# Altium PCB BatteryManagementSystem_oldcpu.PcbDoc (part 2 of 2)
Units mil, origin at the board's own origin, x right, y up, seen from the top; angles counter-clockwise.
Board outline 5250 x 2500 mil, 4 copper layers (Top Layer, Internal Plane 2, Internal Plane 1, Bottom Layer); 223 components, 168 nets, 746 pads, 194 vias.
Unrouted connection lines stored in the file: 11.
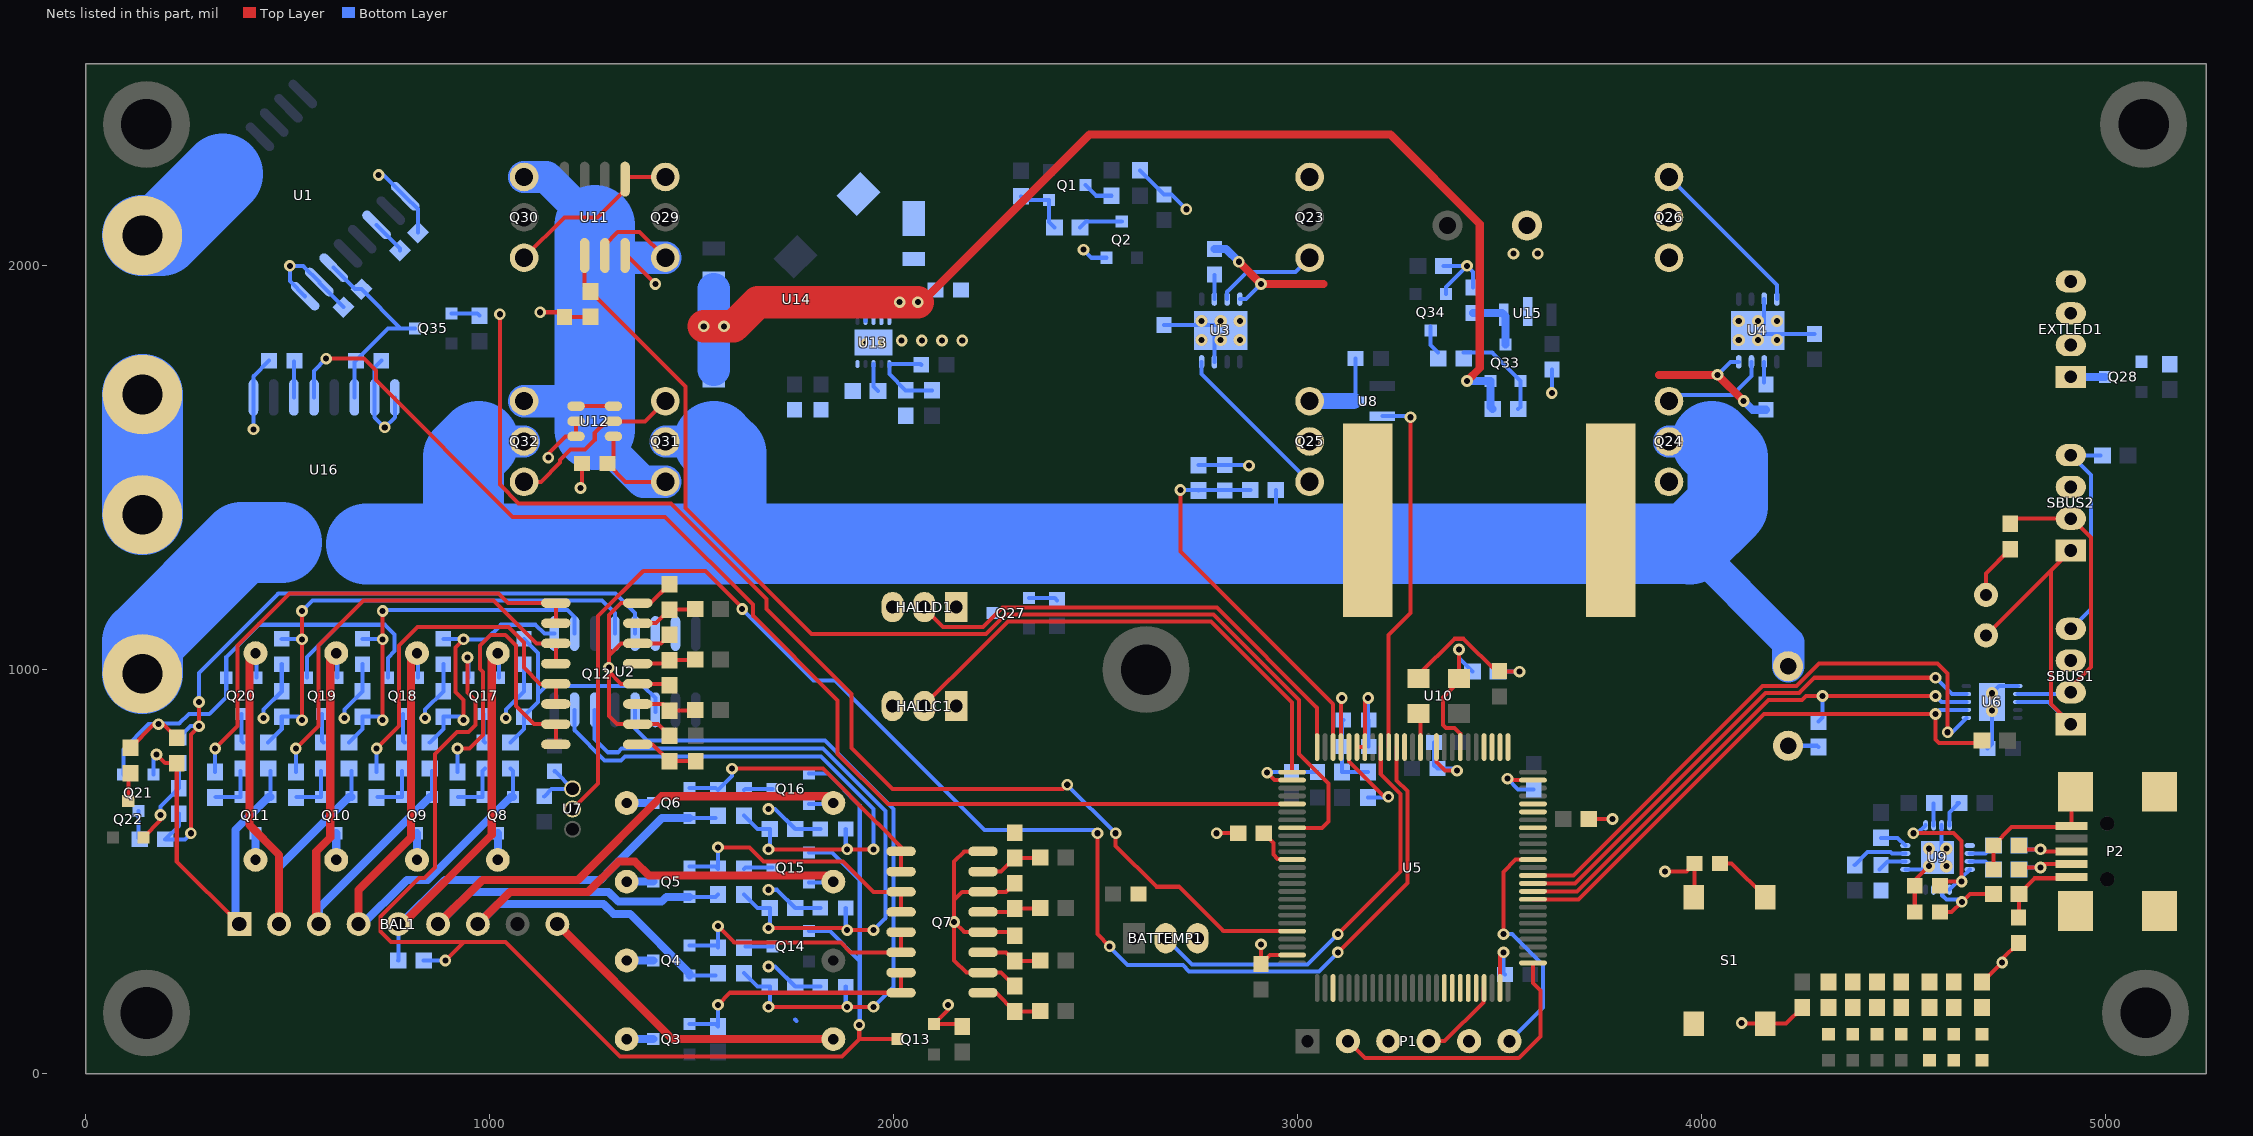
[diagram p4: the nets of this part, all layers, seen from the top]

## Via types
v1: diameter 29, hole 15, Top Layer to Bottom Layer, 174 vias
v2: diameter 30, hole 15, Top Layer to Bottom Layer, tented top, 12 vias
v3: diameter 30, hole 15, Top Layer to Bottom Layer, 6 vias
v4: diameter 19.68, hole 7.87, Top Layer to Bottom Layer, 2 vias

## Nets (pads, with @x,y where several pads share a name; then routed paths per layer and width w, separated by ;. In a path a pad name is that pad's centre, name@x,y a point inside that pad or via, vN(x,y) a via of type N, cw(c..) or ccw(c..) an arc to the next point about the centre after c; other vN are vias at no path point) (continued)
C2: BAL1.7 Q4.S Q15.S R7.1 R16.2 | length 1708.9
  Top Layer w20: BAL1.7@970.55,370 1050.12,449.57 1243.62,449.57 1318.58,524.53 1359.61,524.53 1394.14,490 1835.91,490 R16.2@1850.91,475
  Bottom Layer w10: Q4.S@1495.08,242.6 R7.1@1559.09,242.6 ; Q15.S@1790.08,472.6 R16.2@1848.5,472.6
  Bottom Layer w20: BAL1.7@970.55,370 1020.12,419.57 1282.06,419.57 1306.15,395.47 1347.65,395.47 1495.08,248.05 Q4.S@1495.08,242.6
C3: BAL1.6 Q5.S Q16.S R8.1 R17.2 | length 1918.4
  Top Layer w20: BAL1.6@872.13,370 981.69,479.57 1218.7,479.57 1425.64,686.5 1834.41,686.5 R17.2@1850.91,670
  Bottom Layer w10: Q5.S@1495.08,437.6 1559.09,437.6 R8.1@1565,443.5 ; Q16.S@1790.08,667.6 R17.2@1848.5,667.6
  Bottom Layer w20: BAL1.6@872.13,370 951.69,449.57 1294.48,449.57 1318.58,425.47 1425.57,425.47 1437.69,437.6 Q5.S@1495.08,437.6
C4: BAL1.5 Q6.S Q17.S R9.1 R34.2 R42.1 | length 1829.6
  Top Layer w20: BAL1.5@773.7,360 1005,591.3 1005,1025.91 R34.2@1020,1040.91
  Bottom Layer w10: R42.1@773.5,280 773.7,280.2 BAL1.5@773.7,370 ; R34.2@1020,1040.91 1022.4,1038.5 Q17.S@1022.4,980.08 ; Q6.S@1495.08,632.6 R9.1@1559.09,632.6
  Bottom Layer w20: BAL1.5@773.7,370 779.3,370 888.87,479.57 1274.57,479.57 1289.57,494.57 1289.57,495.51 1426.65,632.6 Q6.S@1495.08,632.6
C5: BAL1.4 Q8.S Q18.S R22.1 R35.2 | length 1391.8
  Top Layer w20: BAL1.4@675.28,360 675.28,454.41 805,584.14 805,1025.91 R35.2@820,1040.91
  Bottom Layer w10: R35.2@820,1040.91 822.4,1038.5 Q18.S@822.4,980.08 ; R22.1@1051.5,755 1057.4,749.09 Q8.S@1057.4,685.08
  Bottom Layer w20: BAL1.4@675.28,360 794.84,479.57 846.44,479.57 1051.95,685.08 Q8.S@1057.4,685.08
C6: BAL1.3 Q9.S Q19.S R23.1 R36.2 | length 1274.4
  Top Layer w20: BAL1.3@576.85,360 570.47,366.38 570.47,549.61 605,584.14 605,1025.91 R36.2@620,1040.91
  Bottom Layer w10: R36.2@620,1040.91 622.4,1038.5 Q19.S@622.4,980.08 ; Q9.S@857.4,685.08 R23.1@857.4,749.09
  Bottom Layer w20: BAL1.3@576.85,360 576.85,409.98 851.95,685.08 Q9.S@857.4,685.08
C7: BAL1.2 Q10.S Q20.S R24.1 R37.2 | length 1245.8
  Top Layer w20: R37.2@420,1040.91 405,1025.91 405,615 478.43,541.57 BAL1.2@478.43,360
  Bottom Layer w10: R37.2@420,1040.91 422.4,1038.5 Q20.S@422.4,980.08 ; Q10.S@657.4,685.08 R24.1@657.4,749.09
  Bottom Layer w20: BAL1.2@478.43,360 478.43,511.55 651.95,685.08 Q10.S@657.4,685.08
C8: BAL1.1 Q11.S Q21.S R25.1 R51.1 | length 1000.5
  Top Layer w10: v1(175,790) 196.5,768.5 R51.1@225,768.5 225,525 BAL1.1@380,370
  Bottom Layer w10: Q21.S@167.4,740.08 167.4,782.4 v1(175,790) ; Q11.S@457.4,685.08 R25.1@457.4,749.09
  Bottom Layer w20: BAL1.1@370.47,369.53 370.47,603.6 451.95,685.08 Q11.S@457.4,685.08 ; BAL1.1@375,365 BAL1.1@380,360
CGND: BAL1.9 R14.2 | length 801.6
  Top Layer w20: BAL1.9@1167.4,370 1452.4,85 R14.2@1850.91,85
CLK8MHZ: U5.12 U10.3 | length 85.4
  Top Layer w10: U10.3@3300,891.69 3304.68,887.01 U5.12@3304.68,808.23
CLK_EN: R78.2 U5.7 U10.1 | length 357.6
  Top Layer w10: v1(3400,1050) U10.1@3400,978.31 3400,970.29 3360.44,930.73 3360.44,863.1 3367.47,856.07 3389.45,856.07 3403.11,842.41 U5.7@3403.11,808.23
  Bottom Layer w10: v1(3400,1050) 3400,1028.5 R78.2@3433.5,995
DEBUG_CTS: R72.2 U5.70 U9.4 | length 69.9
  Bottom Layer w10: U9.4@4614.53,614.72 4614.53,646.02 R72.2@4638.5,670 R72.2@4633.82,670
DEBUG_RTS: R71.2 U5.71 U9.16 | length 68.1
  Bottom Layer w10: R71.2@4445,583.5 4486.3,583.5 U9.16@4505.28,564.53
DEBUG_RXI: R69.2 U5.69 U9.15 | length 139.8
  Bottom Layer w10: R69.2@4380,516.5 4411.69,548.18 4468.67,548.18 4472.01,544.84 U9.15@4505.28,544.84
DEBUG_TXO: R70.2 U5.68 U9.2 | length 53.9
  Bottom Layer w10: U9.2@4575.16,614.72 R70.2@4575.16,668.66
DISCHARGE_EN: R85.1 U5.33 U11.2 | length 2911.8
  Top Layer w10: U11.2@1235,2025.51 1235,1951.5 R85.1@1250,1936.5 1485,1701.5 1485,1400 1796.5,1088.5 2228.5,1088.5 2276.5,1136.5 2792.54,1136.5 3003.77,925.27 3003.77,791.21 3076.5,718.48 3076.5,624.02 3060.98,608.5 2986.85,608.5 U5.33@2986.77,608.43
EXTLED_5V_E\N\: Q28.G R62.2 U5.96
EXTLED_CLK: EXTLED1.3 U5.95
EXTLED_DATA: EXTLED1.2 U5.93
GND: BAT1.- BATTEMP1.3 C1.2 C2.2 C3.2 C4.2 C5.2 C6.2 C7.2 C8.2 C9.2 C10.2 C11.2 C12.2 C13.2 C14.2 C15.2 C16.2 C19.1 C20.1 C21.1 C22.1 C23.2 C24.2 C25.2 C26.2 C28.2 C29.2 C30.2 C31.2 C32.2 C33.2 C34.2 C35.2 C36.2 C37.2 C38.2 C39.2 C40.2 C41.1 C43.2 C44.2 C46.2 C47.2 C48.2 C49.2 C50.2 C51.2 D2.A EXTLED1.4 HALLC1.3 HALLD1.3 P1.3 P2.5 P2.SHD Q2.S Q7.10 Q7.12 Q7.14 Q7.16 Q12.10 Q12.12 Q12.14 Q12.16 Q13.S Q22.S Q25.S Q26.S Q34.S R4.2 R5.2 R18.2 R19.2 R20.2 R21.2 R38.2 R39.2 R40.2 R41.2 R47.2 R48.2 R49.2 R50.2 R57.2 R58.2 R59.2 R60.2 R65.2 R66.2 R67.2 R77.2 R78.1 R85.2 R86.2 R88.2 R91.2 R93.2 RAIL1.- S1.A SBUS1.3 SBUS2.3 U1.9 U1.15 U1.16 U2.6 U2.7 U3.7 U4.7 U5.10 U5.19 U5.20 U5.27 U5.49 U5.74 U5.99 U6.6 U7.3 U8.3 U9.3 U9.13 U10.2 U11.4 U12.2 U12.3 U13.10 U13.PAD U14.1 U15.2 U16.9 U16.15 U16.16 | length 9033.5
  Top Layer w10: Q22.S@142.4,584.92 185,627.52 v1(185,640) ; v1(1125,1885) C40.2@1181.5,1885 ; v1(1145,1525) 1145,1535 1187.6,1577.6 U12.3@1213.74,1577.6 U12.2@1213.74,1615 ; C40.2@1185,1873.5 R85.2@1250,1873.5 ; v1(1225,1450) 1228.5,1453.5 C41.1@1228.5,1510 ; U11.4@1335,2000 U11.4@1335,2025.51 1339.49,2025.51 v1(1410,1955) ; R38.2@1445,836.5 1416.5,865 Q12.10@1366.38,865 1315,865 1295,885 v1@1295,995 ; R39.2@1445,961.5 1441.5,965 Q12.12@1366.38,965 1325,965 v1@1295,995 ; R40.2@1445,1086.5 1423.5,1065 Q12.14@1366.38,1065 1325,1065 1295,1035 ; R41.2@1445,1211.5 1398.5,1165 Q12.16@1366.38,1165 1325,1165 1295,1135 1295,1035 ; v1(2135,170) 2135,157.32 Q13.S@2100.08,122.4 2164.09,122.4 R5.2@2170,116.5 ; Q7.16@2221.38,550 2175,550 2150,525 2150,430 ; R18.2@2300,216.5 2266.5,250 Q7.10@2221.38,250 2180,250 2150,280 v1(2150,375) ; R19.2@2300,341.5 2291.5,350 Q7.12@2221.38,350 2175,350 v1(2150,375) ; R20.2@2300,471.5 2278.5,450 Q7.14@2221.38,450 2170,450 2150,430 ; BATTEMP1.3@2752.48,335 BATTEMP1.3@2752.48,359.02 ; v1(2800,595) R67.2@2853.5,595 ; v1(2910,320) C31.2@2910,271.5 2931.97,293.46 U5.49@2986.77,293.46 ; v1(2925,745) 2943.46,726.54 U5.27@2986.77,726.54 ; U5.20@3147.2,808.23 U5.19@3166.89,808.23 3166.89,921.89 v1(3175,930) ; U10.2@3300,978.31 3300,987.48 3389.02,1076.5 3410.98,1076.5 3492.48,995 v1(3550,995) ; U5.10@3344.06,808.23 3344.06,770.94 3365,750 v1(3395,750) ; U5.74@3501.54,211.77 v1@3501.54,291.54 ; v1(3520,730) 3523.46,726.54 U5.99@3583.23,726.54 ; R77.2@3721.5,630 v1(3780,630) ; v1@3900,500 3963.5,500 C38.2@3983.5,520 3983.5,438.58 S1.A@3981.42,436.5 ; C26.2@4528.5,400 C28.2@4528.5,465 4528.5,478.5 v3(4563.35,513.35) ; R66.2@4695,226.5 4696.5,226.5 v1(4745,275) 4745,283.5 C23.2@4785,323.5 ; C24.2@4723.5,505 C25.2@4723.5,565 4768.5,610 4913.43,610 P2.5@4916.42,612.99 4916.42,687.8 P2.SHD@4926.26,697.64 ; v1@1295,995 v1(1295,1005) 1295,1035 ; v1(2150,375) 2150,430
  Bottom Layer w10: v1(185,640) 185,661.5 R60.2@230,706.5 C12.2@230,768.5 C12.2@230.22,768.5 ; v1(415,1595) U16.9@415,1674.13 415,1726.5 C50.2@453.5,1765 ; v1(440,880) 440,901.5 R59.2@485,946.5 C11.2@485,1013.5 ; U1.16@542.92,1924.59 505,1962.51 v1(505,2000) 538.22,2000 U1.15@578.28,1959.94 578.28,1957.18 C1.2@637.73,1897.73 ; v1(640,880) 640,901.5 R58.2@685,946.5 C10.2@685,1013.5 ; v1(725,2225) 737.49,2225 U1.9@790.41,2172.08 822.27,2140.22 C3.2@822.27,2082.27 ; C49.2@731.5,1765 715,1748.5 U16.15@715,1674.13 715,1625 v1(740,1600) 765,1625 U16.16@765,1674.13 ; v1@830,880 v1(840,880) 840,901.5 R57.2@885,946.5 C9.2@885,1013.5 ; v1(1040,880) 1040,901.5 R50.2@1085,946.5 C8.2@1085,1010 ; C21.1@1135,686.5 1153.5,705 U7.3@1205,705 1161.5,748.5 C2.2@1160,748.5 ; v1(1690,265) 1706.5,265 R47.2@1756.5,215 C5.2@1818.5,215 ; v1(1690,455) 1711.5,455 R48.2@1756.5,410 C6.2@1818.5,410 ; v1(1690,655) 1706.5,655 R49.2@1756.5,605 C7.2@1818.5,605 ; 1756.5,133.5 1760,130 ; v1(2470,2040) 2490.08,2019.92 Q2.S@2527.6,2019.92 ; R4.2@2610,2236.5 C4.2@2670,2176.5 2688.5,2176.5 v1(2725,2140) ; C16.2@2670,1853.5 U3.7@2796.5,1853.5 ; BATTEMP1.3@2752.48,335 BATTEMP1.3@2752.48,360 ; R93.2@2755,1506.5 C51.2@2820,1506.5 2878.5,1506.5 v1(2880,1505) ; U3.7@2794.25,1762.24 U3.7@2794.25,1824.25 ; v1(2925,745) 2926.5,746.5 C30.2@2985,746.5 C34.2@3050,746.5 ; U8.3@3139.57,1665 3143.5,1668.94 C22.1@3143.5,1770 ; C36.2@3175,876.5 v1(3175,930) ; C37.2@3176.5,810 C36.2@3176.5,875 ; C39.2@3338.5,820 3338.5,762.99 C29.2@3346.5,755 3390,755 v1(3395,750) ; R91.2@3361.5,2000 v1(3420,2000) ; Q34.S@3367.4,1930.08 3367.4,1947.4 v1(3420,2000) ; C47.2@3435,1946.5 3435,1985 v1(3420,2000) ; R78.1@3496.5,995 v1(3550,995) ; v1(3510,300) 3510,248.5 C32.2@3513.5,245 ; v1(3520,730) 3546.5,703.5 C33.2@3585,703.5 ; v1(3630,1685) C48.2@3630,1743.5 ; U4.7@4148.5,1831.5 C15.2@4280,1831.5 ; U4.7@4155.75,1855.75 U4.7@4155.75,1917.76 ; C13.2@4215,811.57 4286.93,811.57 R65.2@4290,808.5 ; U9.13@4505.28,505.47 4555.47,505.47 v3(4563.35,513.35) ; U9.13@4585,535 4594.84,544.84 U9.3@4594.84,614.72 ; C19.1@4708.5,805 4720,816.5 v3(4720,898.35) ; v3(4720,941.65) 4737.72,959.37 U6.6@4783.58,959.37 ; SBUS1.3@4915,1022.48 SBUS1.3@4915,1035.36
  Bottom Layer w40: Q25.S@3030,1665 U8.3@3139.57,1665
  Bottom Layer w200: RAIL1.-@140,1383.7 BAT1.-@140,1681.3
  other v1: 3910,500 2020,1815 2070,1815 2120,1815 2170,1815 3535,2030 3595,2030
  other v2: 2762.76,1816.38 2810,1816.38 2857.24,1816.38 4092.76,1816.38 4140,1816.38 4187.24,1816.38 2762.76,1863.62 2810,1863.62 2857.24,1863.62 4092.76,1863.62 4140,1863.62 4187.24,1863.62
  other v3: 4606.65,513.35 4563.35,556.65 4606.65,556.65
  other v4: 1928.35,1810 1971.65,1810
HALL_3V3_E\N\: Q27.G R61.2 U5.67 | length 72.4
  Bottom Layer w10: Q27.G@2335.08,1177.4 2399.09,1177.4 R61.2@2405,1171.5
HALL_CHARGE: HALLC1.2 U5.26 | length 1254.6
  Top Layer w10: HALLC1.2@2076.26,910 2076.26,913.23 2206.03,1043 2207.04,1043 2283.54,1119.5 2785.5,1119.5 2986.77,918.23 U5.26@2986.77,746.22
HALL_DISCHARGE: HALLD1.2 U5.25 | length 1218.1
  Top Layer w10: HALLD1.2@2076.26,1158.23 HALLD1.2@2076.26,1155 2076.26,1151.77 2122.53,1105.5 2221.46,1105.5 2269.46,1153.5 2800.94,1153.5 3048.78,905.66 U5.25@3048.78,808.23
ISENS_3V3_E\N\: Q35.G R94.2 U5.46 | length 3034.9
  Top Layer w10: v1(1025,1880) 1025,1457.92 1070.92,1412 1448.56,1412 1685.5,1175.06 1685.5,1150 1895.5,940 1895.5,805.67 1997,704.17 2419.17,704.17 v1(2430,715) ; v1(2550,595) 2550,563.48 2650.98,462.5 2706.33,462.5 2816.31,352.52 U5.46@2986.77,352.52
  Bottom Layer w10: Q35.G@905.08,1882.4 969.09,1882.4 R94.2@975,1876.5 ; v1(2430,715) v1(2550,595)
LED1: R81.2 U5.1
LED2: R82.2 U5.2
LED3: R83.2 U5.3
LED4: R84.2 U5.4
NetBAT1_+: BAT1.+ U1.1 U1.2 U1.3 U1.4 | length 261.8
  Bottom Layer w200: BAT1.+@140,2075 186.67,2075 338.8,2227.14
NetC1_1: C1.1 C49.1 Q35.D U1.14 U16.14 | length 500
  Bottom Layer w10: U1.14@613.63,1995.3 666.66,1942.27 C1.1@682.27,1942.27 779.54,1845 ; U16.14@665,1674.13 665,1761.5 C49.1@668.5,1765 748.5,1845 779.54,1845 ; Q35.D@814.92,1845 779.54,1845
NetC3_1: C3.1 U1.11 | length 87.7
  Bottom Layer w10: U1.11@719.7,2101.37 777.73,2043.34 C3.1@777.73,2037.73
NetC5_1: C5.1 R43.2 R47.1 U2.12 | length 1719.2
  Top Layer w10: v1(1690,165) v1(1885,165) v1(1950,165)
  Bottom Layer w10: U2.12@1360,900.51 1360,854.5 1389.5,825 1830,825 1999.5,655.5 1999.5,214.5 v1(1950,165) ; R43.2@1630,248.5 1663.5,215 R47.1@1693.5,215 1693.5,168.5 v1(1690,165) ; C5.1@1881.5,215 1881.5,168.5 v1(1885,165)
NetC6_1: C6.1 R44.2 R48.1 U2.14 | length 1628.3
  Top Layer w10: v1(1690,360) 1880,360 v1(1885,355) v1(1950,355)
  Bottom Layer w10: U2.14@1260,900.51 1260,828.28 1292.78,795.5 1317.22,795.5 1326.72,805 1825,805 1979.5,650.5 1979.5,384.5 v1(1950,355) ; R44.2@1630,443.5 1663.5,410 R48.1@1693.5,410 1693.5,363.5 v1(1690,360) ; C6.1@1881.5,410 1881.5,358.5 v1(1885,355)
NetC7_1: C7.1 R45.2 R49.1 U2.15 | length 1419.4
  Top Layer w10: v1(1690,555) v1(1885,555) v1(1950,555)
  Bottom Layer w10: U2.15@1210,900.51 1210,850 1284.5,775.5 1325.5,775.5 1335,785 1820,785 1950,655 v1(1950,555) ; R45.2@1630,638.5 1663.5,605 R49.1@1693.5,605 1693.5,558.5 v1(1690,555) ; C7.1@1881.5,605 1881.5,558.5 v1(1885,555)
NetC8_1: C8.1 R46.2 R50.1 U2.11 | length 644.6
  Bottom Layer w10: R46.2@1051.5,820 1085,853.5 R50.1@1085,883.5 1085,884.93 1119.69,919.61 1119.69,940 ; C8.1@1085,1076.5 1119.69,1041.81 1119.69,940 ; U2.11@1410,895.51 1410,930 1380,960 1139.69,960 1119.69,940
NetC9_1: C9.1 R53.2 R57.1 U2.1 | length 647.1
  Top Layer w10: v1(935,875) 935,925 915,945 915,1055 v1(935,1075)
  Bottom Layer w10: R53.2@851.5,820 885,853.5 R57.1@885,883.5 926.5,883.5 v1(935,875) ; C9.1@885,1076.5 933.5,1076.5 v1(935,1075) 991.12,1075 1027.3,1111.18 1113.82,1111.18 1135.51,1089.49 U2.1@1160,1089.49
NetC10_1: C10.1 R54.2 R58.1 U2.2 | length 975.6
  Top Layer w10: v1(735,875) v1(735,1075) v1(735,1145)
  Bottom Layer w10: R54.2@651.5,820 685,853.5 R58.1@685,883.5 726.5,883.5 v1(735,875) ; C10.1@685,1076.5 733.5,1076.5 v1(735,1075) ; v1(735,1145) 737.8,1147.8 1192.2,1147.8 1210,1130 U2.2@1210,1089.49
NetC11_1: C11.1 R55.2 R59.1 U2.4 | length 1286.9
  Top Layer w10: v1(535,875) v1(535,1075) v1(535,1145)
  Bottom Layer w10: R55.2@451.5,820 485,853.5 R59.1@485,883.5 v1@526.5,883.5 ; C11.1@485,1076.5 v1@533.5,1076.5 ; v1(535,1145) 561.5,1171.5 1278.5,1171.5 1310,1140 U2.4@1310,1089.49
NetC12_1: C12.1 R56.2 R60.1 U2.5 | length 1846.3
  Top Layer w10: v1(260,595) 260,840 v1(280,860) v1(280,920)
  Bottom Layer w10: R60.1@230,643.5 230,613.5 R56.2@196.5,580 245,580 v1(260,595) ; C12.1@230,831.5 258.5,860 v1(280,860) ; v1(280,920) 280,992.16 476.34,1188.5 1311.5,1188.5 1360,1140 U2.5@1360,1089.49
NetC17_1: C17.1 L1.1 Q24.S Q26.D U4.4 | length 366.9
  Top Layer w20: 3895,1730 v1(4040,1730) v1(4105,1665)
  Bottom Layer w10: v1(4040,1730) 4072.24,1762.24 U4.4@4092.76,1762.24
  Bottom Layer w20: v1(4105,1665) 4126.5,1643.5 C17.1@4160,1643.5
NetC17_2: C17.2 U4.2 | length 51.5
  Bottom Layer w10: C17.2@4155.75,1710.75 U4.2@4155.75,1762.24
NetC18_1: C18.1 L1.2 Q23.S Q25.D U3.4 | length 374
  Top Layer w20: v1(2855,2010) v1(2910,1955) 3065,1955
  Bottom Layer w10: U3.4@2857.24,1917.76 2872.76,1917.76 v1(2910,1955)
  Bottom Layer w20: C18.1@2795,2041.5 2823.5,2041.5 v1(2855,2010)
NetC18_2: C18.2 U3.2 | length 60
  Bottom Layer w10: U3.2@2794.25,1917.76 C18.2@2794.25,1977.76
NetC23_1: C23.1 FB1.2 P2.1 | length 206.4
  Top Layer w10: C23.1@4785,386.5 4786.5,387.99 FB1.2@4786.5,445 4825,483.5 4912.91,483.5 P2.1@4916.42,487.01
NetC24_1: C24.1 P2.2 R75.1 | length 191.1
  Top Layer w10: C24.1@4786.5,505 4791.5,510 v1(4840,510) 4848.5,518.5 P2.2@4916.42,518.5
  Bottom Layer w10: R75.1@4786.5,505 4791.5,510 v1(4840,510)
NetC25_1: C25.1 P2.3 R76.1 | length 193.8
  Top Layer w10: C25.1@4786.5,565 4796.5,555 v1(4840,555) 4845,550 P2.3@4916.42,550
  Bottom Layer w10: R76.1@4786.5,565 4796.5,555 v1(4840,555)
NetC26_1: C26.1 FB1.1 U9.10 | length 220.7
  Top Layer w10: C26.1@4591.5,400 4620,400 v1(4645,425) 4665,445 FB1.1@4723.5,445
  Bottom Layer w10: U9.10@4594.84,455.28 4596.62,453.5 4596.62,440.97 4607.11,430.48 4639.52,430.48 v1(4645,425)
NetC27_1: C27.1 U9.14 | length 72.1
  Bottom Layer w10: C27.1@4441.5,505 4461.65,525.16 U9.14@4505.28,525.16
NetC36_1: C36.1 C37.1 FB2.1 R79.1 U5.22 | length 317.6
  Top Layer w10: U5.22@3107.83,808.23 3107.83,927.83 v1(3110,930)
  Bottom Layer w10: C36.1@3113.5,875 3110,871.5 FB2.1@3110,746.5 R79.1@3175,746.5
NetC41_2: C41.2 Q29.S Q30.S Q31.S Q32.S U11.3 U12.4 | length 1606.3
  Top Layer w10: U11.3@1285,2025.51 1285,2051.84 1316.98,2083.82 1371.18,2083.82 Q29.S@1435,2020 ; U12.4@1306.26,1577.6 1306.26,1524.76 C41.2@1291.5,1510 1336.5,1465 Q31.S@1435,1465
  Bottom Layer w80: Q32.S@1085,1665 1180,1665 ; Q30.S@1085,2220 1140,2220 1260,2100 ; 1260,1595 1260,1585 1380,1465 Q31.S@1435,1465 ; 1340,2020 Q29.S@1435,2020
  Bottom Layer w200: 1260,1595 1260,2100
NetC42_1: C42.1 U13.2 | length 80
  Bottom Layer w10: C42.1@1898.5,1930 1930.32,1898.19 U13.2@1930.32,1863.15
NetC42_2: C42.2 D2.C L2.1 U13.3
NetC43_1: C43.1 D1.C D3.C Q33.S R89.2 U13.4 U13.5 | length 2941
  Top Layer w20: v1(2060,1910) 2070,1910 2485,2325 3230,2325 3451.5,2103.5 3451.5,1746.5 v1(3420,1715)
  Top Layer w80: v1(1530,1850) 1603.78,1850 1663.28,1909.5 v1@2059.5,1909.5
  Bottom Layer w20: v1(3420,1715) 3420.08,1714.92 Q33.S@3477.6,1714.92 3477.6,1650.91 R89.2@3483.5,1645
  Bottom Layer w80: D1.C@1555,1742.4 D3.C@1555,1942.6
  other v1: 1580,1850 2015,1910
NetC45_1: C45.1 R87.2 R88.1 U13.6 | length 227.1
  Bottom Layer w10: C45.1@2068.5,1755 2066.65,1756.85 U13.6@1989.37,1756.85 1989.37,1732.13 R88.1@2030,1691.5 R87.2@2095,1691.5
NetC47_1: C47.1 Q33.D U15.3 | length 153.5
  Bottom Layer w20: C47.1@3435,1883.5 3506.57,1883.5 U15.3@3510.94,1879.13 3515,1875.08 Q33.D@3515,1805.08
NetC50_1: C50.1 U16.11 | length 89.4
  Bottom Layer w10: U16.11@515,1674.13 C50.1@515,1763.5
NetEXTLED1_1: EXTLED1.1 Q28.D | length 84.9
  Bottom Layer w20: EXTLED1.1@4915,1725 Q28.D@4999.92,1725
NetHALLC1_1: HALLC1.1 HALLD1.1 Q27.D
NetJ1_1: J1.1 R68.1 | length 138.4
  Top Layer w10: J1.1@4705,1185 4705,1238.5 R68.1@4765,1298.5
NetJ1_2: J1.2 SBUS1.1 SBUS2.1 U6.8 | length 852.2
  Top Layer w10: J1.2@4705,1085 4865.5,1245.5 ; SBUS1.1@4915,865 4865.5,914.5 4865.5,1245.5 ; SBUS2.1@4915,1295 4865.5,1245.5
  Bottom Layer w10: U6.8@4783.58,920 4860,920 SBUS1.1@4915,865
NetLED1_C: LED1.C R81.1
NetLED2_C: LED2.C R82.1
NetLED3_C: LED3.C R83.1
NetLED4_C: LED4.C R84.1
NetQ1_D: Q1.D R3.1 | length 75.9
  Bottom Layer w10: Q1.D@2475.08,2200 2501.57,2173.5 R3.1@2540,2173.5
NetQ1_G: Q1.G R1.2 R2.1 | length 147
  Bottom Layer w10: R1.2@2315,2172.01 2324.41,2162.6 Q1.G@2384.92,2162.6 2384.92,2108.58 R2.1@2398.5,2095
NetQ2_D: Q2.D R2.2 | length 109.7
  Bottom Layer w10: R2.2@2461.5,2095 2476.57,2110.08 Q2.D@2565,2110.08
NetQ3_D: Q3.D R14.1 | length 65.8
  Bottom Layer w20: R14.1@1339.09,85 Q3.D@1404.92,85
NetQ3_G: Q3.G Q7.7 R6.2 | length 641.9
  Top Layer w10: v1(1565,170) 1595,200 Q7.7@2018.62,200 Q7.7@2018.62,250
  Bottom Layer w10: Q3.G@1495.08,122.4 1559.09,122.4 R6.2@1565,116.5 v1(1565,170)
NetQ4_D: Q4.D R15.1 | length 65.8
  Bottom Layer w20: R15.1@1339.09,280 Q4.D@1404.92,280
NetQ4_G: Q4.G Q7.5 R7.2 | length 648.1
  Top Layer w10: v1(1565,365) 1605.47,324.53 1869.35,324.53 1893.88,300 Q7.5@2018.62,300 Q7.5@2018.62,350
  Bottom Layer w10: Q4.G@1495.08,317.4 R7.2@1559.09,317.4 ; R7.2@1565,311.5 v1(1565,365)
NetQ5_D: Q5.D R16.1 | length 65.8
  Bottom Layer w20: R16.1@1339.09,475 Q5.D@1404.92,475
NetQ5_G: Q5.G Q7.3 R8.2 | length 675.1
  Top Layer w10: v1(1565,560) 1643.28,560 1677.78,525.5 1874.5,525.5 1950,450 Q7.3@2018.62,450 Q7.3@2018.62,400
  Bottom Layer w10: Q5.G@1495.08,512.4 1559.09,512.4 R8.2@1565,506.5 v1(1565,560)
NetQ6_D: Q6.D R17.1 | length 65.8
  Bottom Layer w20: R17.1@1339.09,670 Q6.D@1404.92,670
NetQ6_G: Q6.G Q7.1 R9.2 | length 700.6
  Top Layer w10: v1(1600,755) 1824.79,755 1960.63,619.17 1960.83,619.17 2018.62,561.38 Q7.1@2018.62,550 Q7.1@2018.62,500
  Bottom Layer w10: Q6.G@1495.08,707.4 1559.09,707.4 R9.2@1565,701.5 1600,736.5 v1(1600,755)
NetQ7_9: Q7.9 R10.2 R18.1 | length 159.9
  Top Layer w10: Q7.9@2221.38,200 2253.5,200 R18.1@2300,153.5 R10.2@2362.01,153.5
NetQ7_11: Q7.11 R11.2 R19.1 | length 149.5
  Top Layer w10: Q7.11@2221.38,300 2278.5,300 R19.1@2300,278.5 R11.2@2362.01,278.5
NetQ7_13: Q7.13 R12.2 R20.1 | length 144.2
  Top Layer w10: Q7.13@2221.38,400 2291.5,400 R20.1@2300,408.5 R12.2@2362.01,408.5
NetQ7_15: Q7.15 R13.2 R21.1 | length 154.5
  Top Layer w10: Q7.15@2221.38,500 2266.5,500 R21.1@2300,533.5 R13.2@2362.01,533.5
NetQ8_D: Q8.D R34.1 | length 65.8
  Bottom Layer w20: R34.1@1020,529.09 Q8.D@1020,594.92
NetQ8_G: Q8.G R22.2 R26.1 | length 133.4
  Bottom Layer w10: R26.1@921.57,685.08 Q8.G@982.6,685.08 982.6,749.09 R22.2@988.5,755
NetQ9_D: Q9.D R35.1 | length 65.8
  Bottom Layer w20: R35.1@820,529.09 Q9.D@820,594.92
NetQ9_G: Q9.G R23.2 R27.1 | length 125
  Bottom Layer w10: R27.1@721.57,685.08 Q9.G@782.6,685.08 R23.2@782.6,749.09
NetQ10_D: Q10.D R36.1 | length 65.8
  Bottom Layer w20: R36.1@620,529.09 Q10.D@620,594.92
NetQ10_G: Q10.G R24.2 R28.1 | length 125
  Bottom Layer w10: R28.1@521.57,685.08 Q10.G@582.6,685.08 R24.2@582.6,749.09
NetQ11_D: Q11.D R37.1 | length 65.8
  Bottom Layer w20: R37.1@420,529.09 Q11.D@420,594.92
NetQ11_G: Q11.G R25.2 R29.1 | length 125
  Bottom Layer w10: R29.1@321.57,685.08 Q11.G@382.6,685.08 R25.2@382.6,749.09
NetQ12_1: Q12.1 R29.2 | length 1237.2
  Top Layer w10: v1(320,805) 375.47,860.47 375.47,1059.35 504.62,1188.5 1021.5,1188.5 1045,1165 Q12.1@1163.62,1165 Q12.1@1163.62,1115
  Bottom Layer w10: R29.2@320,746.5 v1(320,805)
NetQ12_3: Q12.3 R28.2 | length 1064.5
  Top Layer w10: v1(520,805) 575.47,860.47 575.47,1059.35 687.62,1171.5 1008.95,1171.5 1115.45,1065 Q12.3@1163.62,1065 Q12.3@1163.62,1015
  Bottom Layer w10: R28.2@520,746.5 v1(520,805)
NetQ12_5: Q12.5 R27.2 | length 887.7
  Top Layer w10: v1(720,805) 775.47,860.47 775.47,1059.35 821.56,1105.43 1046.73,1105.43 1084.53,1067.63 1084.53,1005.47 1125,965 Q12.5@1163.62,965 Q12.5@1163.62,915
  Bottom Layer w10: R27.2@720,746.5 v1(720,805)
NetQ12_7: Q12.7 R26.2 | length 787.1
  Top Layer w10: v1(920,805) 950,805 983,838 983,994.6 975.47,1002.13 975.47,1059.35 1001.56,1085.43 1038.44,1085.43 1064.53,1059.35 1064.53,910.47 1110,865 Q12.7@1163.62,865 Q12.7@1163.62,815
  Bottom Layer w10: R26.2@920,746.5 v1(920,805)
NetQ12_9: Q12.9 R30.2 R38.1 | length 160.8
  Top Layer w10: Q12.9@1366.38,815 1403.5,815 R38.1@1445,773.5 R30.2@1510,773.5
NetQ12_11: Q12.11 R31.2 R39.1 | length 147.5
  Top Layer w10: Q12.11@1366.38,915 1428.5,915 R39.1@1445,898.5 R31.2@1507.01,898.5
NetQ12_13: Q12.13 R32.2 R40.1 | length 132.1
  Top Layer w10: Q12.13@1366.38,1015 R40.1@1436.5,1015 ; R40.1@1445,1023.5 R32.2@1507.01,1023.5
NetQ12_15: Q12.15 R33.2 R41.1 | length 154.5
  Top Layer w10: Q12.15@1366.38,1115 1411.5,1115 R41.1@1445,1148.5 R33.2@1507.01,1148.5
NetQ13_D: Q13.D Q14.G Q15.G Q16.G Q17.G R42.2 | length 3452.8
  Top Layer w10: v1(890,280) 935,325 ; v1(945,1030) 945,943.28 964.5,923.78 964.5,862.78 947.22,845.5 918.78,845.5 864.53,791.25 864.53,510.65 838.44,484.57 824.57,484.57 729.17,389.17 729.17,351.56 755.26,325.47 1038.57,325.47 1322.04,42 1872,42 1915,85 ; v1(1915,120) 1915,85 ; Q13.D@2009.92,85 1915,85
  Bottom Layer w10: R42.2@836.5,280 v1(890,280) ; v1(945,1030) 947.6,1027.4 Q17.G@947.6,980.08 ; Q14.G@1790.08,352.4 1842.6,352.4 1916.18,278.82 ; Q15.G@1790.08,547.4 1847.6,547.4 1916.18,478.82 ; Q16.G@1790.08,742.4 1837.6,742.4 1916.18,663.82 1916.18,478.82 ; v1(1915,120) 1916.18,121.18 1916.18,278.82 ; 1916.18,278.82 1916.18,478.82
NetQ14_D: Q14.D R43.1 | length 66.4
  Bottom Layer w10: R43.1@1633.5,315 Q14.D@1699.92,315
NetQ15_D: Q15.D R44.1 | length 71.4
  Bottom Layer w10: R44.1@1630,506.5 1633.5,510 Q15.D@1699.92,510
NetQ16_D: Q16.D R45.1 | length 71.4
  Bottom Layer w10: R45.1@1630,701.5 1633.5,705 Q16.D@1699.92,705
NetQ17_D: Q17.D R46.1 | length 71.4
  Bottom Layer w10: Q17.D@985,889.92 985,823.5 R46.1@988.5,820
NetQ18_D: Q18.D R53.1 | length 71.4
  Bottom Layer w10: Q18.D@785,889.92 785,823.5 R53.1@788.5,820
NetQ18_G: Q18.G Q19.G Q20.G Q21.G R51.2 R52.1 | length 1375
  Top Layer w10: R52.1@110,820 R52.1@110,806.5 168.5,865 v1(180,865) 191.5,865 R51.2@225,831.5
  Bottom Layer w10: Q21.G@92.6,740.08 92.6,802.6 155,865 v1(180,865) 181.18,866.18 231.18,866.18 255.5,890.5 305.5,890.5 347.6,932.6 Q20.G@347.6,980.08 347.6,1031.48 427.3,1111.18 627.3,1111.18 ; Q19.G@547.6,980.08 547.6,1031.48 627.3,1111.18 ; Q18.G@747.6,980.08 747.6,1028.98 764.5,1045.88 764.5,1087.22 740.54,1111.18 627.3,1111.18
NetQ19_D: Q19.D R54.1 | length 71.4
  Bottom Layer w10: Q19.D@585,889.92 585,823.5 R54.1@588.5,820
NetQ20_D: Q20.D R55.1 | length 71.4
  Bottom Layer w10: Q20.D@385,889.92 385,823.5 R55.1@388.5,820
NetQ21_D: Q21.D R56.1 | length 66.4
  Bottom Layer w10: R56.1@130,583.5 Q21.D@130,649.92
NetQ22_D: Q22.D R52.2 | length 70.5
  Top Layer w10: Q22.D@105,675.08 105,738.06 110,743.06 R52.2@110,743.5
NetQ23_G: Q23.G U3.3 | length 257.1
  Bottom Layer w10: U3.3@2825.75,1917.76 2825.75,1935.75 2875,1985 2995,1985 Q23.G@3030,2020
NetQ24_G: Q24.G U4.3 | length 265.3
  Bottom Layer w10: Q24.G@3920,1665 3935,1680 4077.43,1680 4124.25,1726.83 U4.3@4124.25,1762.24
NetQ25_G: Q25.G U3.8 | length 407.9
  Bottom Layer w10: U3.8@2762.76,1762.24 2762.76,1732.24 Q25.G@3030,1465
NetQ26_G: Q26.G U4.8 | length 412.9
  Bottom Layer w10: Q26.G@3920,2220 4187.24,1952.76 U4.8@4187.24,1917.76
NetQ29_G: Q29.G Q30.G U11.5 | length 448.3
  Top Layer w10: Q30.G@1085,2020 1185,2120 1266.84,2120 1335,2188.16 U11.5@1335,2214.49 1340.51,2220 Q29.G@1435,2220
NetQ31_G: Q31.G Q32.G U12.5 | length 446.6
  Top Layer w10: Q32.G@1085,1465 1126.72,1465 1174.5,1512.78 1174.5,1519.5 1200,1545 1235.82,1545 1260,1569.18 1260,1586.02 1288.98,1615 U12.5@1306.26,1615 1385,1615 Q31.G@1435,1665
NetQ33_G: Q33.G R89.1 R90.2 | length 242.3
  Bottom Layer w10: R90.2@3411.5,1785 3482.32,1785 Q33.G@3552.4,1714.92 3552.4,1650.91 R89.1@3546.5,1645
NetQ34_D: Q34.D R90.1 | length 72.6
  Bottom Layer w10: Q34.D@3330,1849.92 3330,1803.5 R90.1@3348.5,1785
NetR66_1: R66.1 TE1.C
NetR67_1: R67.1 U5.37 | length 114.4
  Top Layer w10: R67.1@2916.5,595 2940.32,571.17 2940.32,541.95 2950.81,531.46 2984.99,531.46 U5.37@2986.77,529.68
NetR68_2: R68.2 SBUS1.2 SBUS2.2 U6.7 | length 761.1
  Top Layer w10: R68.2@4765,1361.5 4777.24,1373.74 SBUS2.2@4915,1373.74 4918.23,1373.74 4964.5,1327.47 4964.5,1006.12 4915,956.62 SBUS1.2@4915,943.74
  Bottom Layer w10: U6.7@4783.58,939.68 4910.94,939.68 SBUS1.2@4915,943.74
NetR73_2: R73.2 RX1.A
NetR74_2: R74.2 TX1.A
NetR75_2: R75.2 U9.7 | length 67.1
  Bottom Layer w10: U9.7@4664.72,525.16 4703.35,525.16 R75.2@4723.5,505
NetR76_2: R76.2 U9.6 | length 67.1
  Bottom Layer w10: U9.6@4664.72,544.84 4703.35,544.84 R76.2@4723.5,565
NetR79_2: R79.2 U5.21 | length 220.1
  Top Layer w10: U5.21@3127.52,808.23 3127.52,772.48 3215,685 v1(3225,685)
  Bottom Layer w10: R79.2@3175,683.5 3223.5,683.5 v1(3225,685)
NetR86_1: R86.1 U13.8 | length 71.6
  Bottom Layer w10: U13.8@1950,1756.85 1950,1701.5 R86.1@1961.5,1690
NetRAIL1_+: RAIL1.+ U16.5 U16.6 U16.7 U16.8 | length 526.5
  Bottom Layer w200: RAIL1.+@140,990 140,1070 385,1315 485,1315
NetRX1_C: RX1.C U9.11
NetTX1_C: TX1.C U9.5
NRST: C27.2 C38.1 P1.5 R80.2 S1.B U5.14 | length 313.9
  Top Layer w10: C38.1@4046.5,520 4075.08,520 S1.B@4158.58,436.5 ; v1(4100,125) 4101.5,123.5 S1.B@4158.58,123.5 4210,123.5 R80.2@4250,163.5
RAIL+: C13.1 D1.A Q24.D Q31.D Q32.D R92.1 U12.1 U12.6 U16.1 U16.2 U16.3 U16.4 | length 5087.2
  Top Layer w10: U12.1@1213.74,1652.4 U12.6@1306.26,1652.4
  Bottom Layer w10: 2946.5,1314.37 R92.1@2946.5,1445
  Bottom Layer w80: 972.87,1565 Q32.D@1085,1565 ; Q31.D@1435,1565 1555,1565 ; Q24.D@3920,1565 4025.67,1565 ; 3971.54,1310.87 4215,1067.41 C13.1@4215,1008.43
  Bottom Layer w200: 695,1310.87 935,1310.87 ; 972.87,1565 935,1527.13 935,1310.87 ; 1555,1565 1585,1535 1585,1310.87 ; 4025.67,1565 4065.43,1525.24 4065.43,1404.76 3971.54,1310.87 3970.91,1311.5 1585.63,1311.5 1585,1310.87 ; 935,1310.87 1585,1310.87
RAIL_I: U5.30 U16.12 | length 3064.2
  Top Layer w10: v1(595,1770) 688.88,1770 718,1740.88 718,1716.84 1056.84,1378 1434.48,1378 1651.5,1160.98 1651.5,1133.5 1861.5,923.5 1861.5,791.58 1985.6,667.48 U5.30@2986.77,667.48
  Bottom Layer w10: U16.12@565,1674.13 565,1740 v1(595,1770)
RAIL_V: C51.1 R92.2 R93.1 U5.23 | length 968.1
  Top Layer w10: v1(2710,1445) 2710,1292.52 3088.15,914.37 U5.23@3088.15,808.23
  Bottom Layer w10: v1(2710,1445) 2753.5,1445 R93.1@2755,1443.5 2756.5,1445 R92.2@2883.5,1445
SUBBUS_RE: R64.2 U5.84 U6.2 | length 1451.4
  Top Layer w10: U5.84@3583.23,431.26 3696.26,431.26 4155,890 v1(4580,890) 4580,827.52 4589.02,818.5 4688.5,818.5 R64.2@4695,825
  Bottom Layer w10: v1(4580,890) 4590.31,900.31 U6.2@4656.42,900.31
SUBBUS_RXI: U5.87 U6.1 | length 1460.6
  Top Layer w10: U5.87@3583.23,490.31 3683.19,490.31 4151.9,959.02 4235.46,959.02 4291.44,1015 4585,1015 4610,990 v1(4610,845)
  Bottom Layer w10: v1(4610,845) 4620.79,845 U6.1@4656.42,880.63
SUBBUS_TE: R65.1 TE1.A U5.85 U6.3 | length 1347.6
  Top Layer w10: U5.85@3583.23,450.94 3691.9,450.94 4165.98,925.02 4249.55,925.02 4259.52,935 v1(4300,935) v1(4580,935)
  Bottom Layer w10: R65.1@4290,871.5 4300,881.5 v1(4300,935) ; v1(4580,935) 4595,920 U6.3@4656.42,920
SUBBUS_TXO: U5.86 U6.4 | length 1300.9
  Top Layer w10: U5.86@3583.23,470.63 3687.55,470.63 4158.94,942.02 4242.5,942.02 4280.48,980 v1(4580,980)
  Bottom Layer w10: v1(4580,980) 4620.31,939.68 U6.4@4656.42,939.68
SWCLK: P1.2 U5.76 | length 705.9
  Top Layer w10: P1.2@3125,80 3167,38 3442.4,38 3548,38 3601.5,91.5 3601.5,205.98 3583.23,224.25 U5.76@3583.23,273.78
SWDIO: P1.4 U5.72 | length 211.8
  Top Layer w10: P1.4@3325,80 3364.57,80 3460.39,175.81 3460.39,209.99 U5.72@3462.17,211.77
SWO: P1.6 U5.89 | length 593.1
  Top Layer w10: v1(3510,345) 3510,499.37 3540.32,529.68 U5.89@3583.23,529.68
  Bottom Layer w10: v1(3510,345) 3531.85,345 3608.18,268.67 3608.18,163.18 P1.6@3525,80
TEMP_AMB: U5.15 U7.2 | length 3551.8
  Top Layer w10: U7.2@1205,655 1268.5,718.5 1268.5,1132.54 1380.12,1244.17 1534.66,1244.17 1625,1153.82 v1(1625,1150) ; v1(2505,595) 2505,345 v1(2535,315) ; v1(3100,300) 3272,472 3272,699.52 3245.63,725.89 U5.15@3245.63,808.23
  Bottom Layer w10: v1(1625,1150) 1802.18,972.82 1855.26,972.82 2224.58,603.5 2496.5,603.5 v1(2505,595) ; v1(2535,315) 2535,313.03 2579.53,268.5 2716.2,268.5 2731.7,253 3053,253 v1(3100,300)
TEMP_BAT: BATTEMP1.2 U5.17 | length 1031.9
  Top Layer w10: v1(3100,345) 3255,500 3255,692.48 3206.26,741.22 U5.17@3206.26,808.23
  Bottom Layer w10: BATTEMP1.2@2673.74,335 2738.74,270 3025,270 v1(3100,345)
TEMP_FETS: U5.16 U8.2 | length 904.8
  Top Layer w10: U5.16@3225.94,808.23 3225.94,1085.94 3280,1140 v1@3280,1620
  Bottom Layer w10: U8.2@3210.43,1627.6 3277.4,1627.6 v1(3280,1625)
U3V3: C28.1 R73.1 R74.1 U9.1 U9.8 U9.9 | length 401
  Top Layer w10: v1(4525,595) 4625,595 4644.72,575.28 v1(4644.72,475.28) 4601.77,475.28 C28.1@4591.5,465
  Bottom Layer w10: v1(4525,595) 4535.75,595 U9.1@4555.47,614.72 ; U9.9@4614.53,455.28 4634.53,475.28 v1(4644.72,475.28) 4644.72,485.47 U9.8@4664.72,505.47
WKUP: R63.2 SBUS1.4 SBUS2.4 U5.53 | length 545
  Bottom Layer w10: SBUS1.4@4915,1101.22 4964.5,1150.72 4964.5,1481.72 SBUS2.4@4915,1531.22 4916.22,1530 R63.2@4988.5,1530
pads on no net: P2. P2.4 U1.10 U1.13 U2.8 U5.5 U5.8 U5.9 U5.13 U5.18 U5.34 U5.35 U5.36 U5.47 U5.51 U5.52 U5.54 U5.55 U5.56 U5.57 U5.58 U5.73 U5.77 U5.78 U5.79 U5.80 U5.81 U5.82 U5.83 U5.88 U5.90 U5.91 U5.92 U5.97 U5.98 U6.5 U6.9 U11.6 U11.7 U11.8 U13.7 U13.9 U16.10 U16.13

## Polygon pours and split planes (outlines as drawn)
GND on Bottom Layer "SwitcherGND" (solid, pour order 39): 1660,2030 1615,1985 1615,1710 1765,1560 2165,1560 2215,1610 2215,2085 2095,2205
NetC43_1 on Bottom Layer "Switcher" (solid, pour order 31): 1965,1855 2100,1855 2125,1880 2125,1965 2115,1975 2110,1980 2020,1980 1995,1955 1990,1950 1990,1900 1965,1875
3V3 on Bottom Layer "Switcher3V3" (solid, pour order 37): 1690,1860 1680,1860 1675,1855 1675,1780 1680,1775 1730,1775 1730,1860
NetC42_2 on Bottom Layer "Switcher" (solid, pour order 33): 1955,1850 1955,1875 1985,1905 1985,1955 2015,1985 2015,2045 2025,2055 2080,2055 2090,2065 2090,2210 2065,2235 1865,2235 1780,2150 1945,1980 1945,1850
5V on Bottom Layer "Switcher" (solid, pour order 35): 1915,1855 1915,2015 1780,2150 1665,2035 1730,1960 1775,1960 1790,1945 1790,1695 1800,1685 1800,1680 1835,1680 1855,1700 1855,1835 1875,1855
GND on Bottom Layer "15VGND" (solid, pour order 9): 3558.19,1922.44 3581.81,1922.44 3582.44,1922.44 3635,1975 3635,2150 3535,2150 3520,2135 3520,1960
NetC18_1 on Top Layer "Top Layer-No Net" (solid, pour order 8): 3220,2300 3245,2275 3245,1125 3220,1100 3060,1100 3035,1125 3035,2275 3060,2300
NetC17_1 on Top Layer "Top Layer-No Net" (solid, pour order 7): 3730,2300 3705,2275 3705,1125 3730,1100 3890,1100 3915,1125 3915,2275 3890,2300
GND on Internal Plane 2 (split plane): 5229.9,20.1 20.1,20.1 20.1,2479.9 5229.9,2479.9
3V3 on Internal Plane 1 (split plane): 5229.9,20.1 20.1,20.1 20.1,2479.9 5229.9,2479.9